# EAGLE board CheckBatteryVoltage (EAGLE 9.5.2)

Size 100.33 x 69.85 mm. Coordinates in mm from the lower left corner, seen from the top.
Outline: 0,22.86 0,0 100.33,0 100.33,69.85
Outline: 0,22.86 0,41.27
Outline: 0,41.27 0,48.26
Outline: 0,48.26 0,69.85 24.13,69.85
Outline: 24.13,69.85 100,69.85
Outline: 0,48.26 24.13,48.26 24.13,69.85
Outline: 0,41.27 50.16,41.27 50.16,22.86 0,22.86
Copper layers (1*16): Top 0.035mm / dielectric 1.5mm / Bottom 0.035mm
Design rules "default": minimum track width 10mil, minimum drill 24mil, track to track 8mil, track to pad 8mil, pad to pad 8mil, via to via 8mil, smd to smd 8mil, copper to edge 40mil, drill to drill 8mil, minimum pad ring 10mil, minimum via ring 8mil, stop-mask expansion 4mil, vias tented up to drill 0mil, thermal gap 10mil
Holes 2 mm at 1.91,67.94 1.91,50.16 22.23,50.16 22.23,67.94 1.91,39.37 1.91,24.77 48.26,24.77 48.26,39.37
Holes 0.35 mm at 82.55,42.55 83.19,62.87 48.9,62.87

## Footprints (pad centres in the part's own frame; a part is rotated, then mirrored left to right if it is on the bottom)
ZDIO-7.5 = drill 0.813 octagon: A 3.81,0; C -3.81,0
0204/7 = drill 0.813 octagon: 1 -3.81,0; 2 3.81,0
PAD-01 = drill 1.321 pad 2.54 octagon: 1 0,0
TL1105 = drill 1 pad 1.676: 1 -2.25,3.25; 2 2.25,3.25; 3 -2.25,-3.25; 4 2.25,-3.25
RTRIM3296W = drill 0.61: 1 0,-2.54; 2 0,0; 3 0,2.54
P1-20Y = drill 2.007 pad 2.54 long: TP 0,0
P1-17Y = drill 1.702 pad 2.121 long: TP 0,0
DIL08 = drill 0.813 long: 1 -3.81,-3.81; 2 -1.27,-3.81; 3 1.27,-3.81; 4 3.81,-3.81; 5 3.81,3.81; 6 1.27,3.81; 7 -1.27,3.81; 8 -3.81,3.81
LSP10 = drill 1.016 pad 2.159 octagon: MP 0,0
TO92- = drill 0.813 long: 1 2.54,0; 2 0,0; 3 -2.54,0
1X01/90 = drill 1.016 long: 1 -1.27,-3.81
E5-8,5 = drill 1.016 pad 2.54: + -2.54,0 | drill 1.016 pad 2.54 octagon: - 2.54,0
MA04-1 = drill 1.016 long: 1 -3.81,0; 2 -1.27,0; 3 1.27,0; 4 3.81,0
MA06-1 = drill 1.016 long: 1 -6.35,0; 2 -3.81,0; 3 -1.27,0; 4 1.27,0; 5 3.81,0; 6 6.35,0
W237-132 = drill 1.194 long: 1 -2.54,-0.635; 2 2.54,-0.635
RS-2,5 = drill 0.813 pad 1.6 octagon: 1 -1.27,0; 2 1.27,0
2X02/90 = drill 1.016 octagon: 1 -1.27,-6.35; 2 -1.27,-3.81; 3 1.27,-6.35; 4 1.27,-3.81
DIL06 = drill 0.813 long: 1 -2.54,-3.81; 2 0,-3.81; 3 2.54,-3.81; 4 2.54,3.81; 5 0,3.81; 6 -2.54,3.81

## Placement (x,y rotation side)
E$1  zener 2.4  [ZDIO-7.5]  13.97,66.04 0 top
E$2  220  [0204/7]  20.95,59.05 270 top
E$3  [PAD-01]  64.14,27.94 0 top
E$4  [TL1105]  108.32,15.38 90 top  (outside the outline)
E$5  [PAD-01]  64.14,22.86 0 top
E$6  [PAD-01]  97.79,63.5 0 top
E$7  [RTRIM3296W]  93.34,31.75 270 top
E$8  [P1-20Y]  4.45,55.88 90 top
E$9  [P1-17Y]  89.53,12.7 0 top
E$10  [P1-20Y]  4.45,61.59 90 top
E$11  [P1-20Y]  12.7,51.44 90 top
E$12  Attiny85  [DIL08]  15.24,31.75 0 top
E$13  [PAD-01]  97.79,66.67 0 top
E$14  zener 2.4  [ZDIO-7.5]  22.23,31.75 270 top
E$15  220  [0204/7]  25.4,31.75 270 top
E$16  1M  [LSP10]  94.61,60.33 0 top
E$17  [0204/7]  113.03,25.4 90 top  (outside the outline)
E$18  [TO92-]  104.14,55.88 90 top  (outside the outline)
E$19  [LSP10]  97.79,60.33 0 top
E$20  [P1-20Y]  5.71,34.29 90 top
E$21  [P1-20Y]  5.71,28.57 90 top
E$22  [1X01/90]  112.39,40.01 180 top  (outside the outline)
E$23  [E5-8,5]  106.05,25.4 270 top  (outside the outline)
E$24  [PAD-01]  94.61,66.67 0 top
E$26  [MA04-1]  102.87,15.24 90 top
E$27  220  [0204/7]  27.94,31.75 90 top
E$28  [MA06-1]  103.93,39.79 90 top  (outside the outline)
E$29  [W237-132]  105.73,66.04 180 top
E$30  [RS-2,5]  113.03,50.8 90 top  (outside the outline)
E$31  [2X02/90]  108.78,51.77 180 top  (outside the outline)
E$32  220  [0204/7]  39.37,31.75 270 top
E$33  Til113  [DIL06]  33.66,31.75 0 top
E$35  [MA04-1]  114.3,13.34 90 top  (outside the outline)
E$37  [P1-17Y]  45.72,35.56 90 top
E$38  [P1-17Y]  45.72,27.94 90 top
E$39  [P1-17Y]  45.72,31.75 90 top
E$45  Attiny85  [DIL08]  13.97,59.05 0 top

## Library data of the parts
E$1 E$14 E$23 = ref-packages-longpad
E$2 E$15 E$17 E$27 E$32 = eagle-ltspice
E$3 E$5 E$6 E$13 E$24 E$30 = discrete
E$4 = switch
E$7 = rcl
E$8-E$11 E$20 E$21 E$37-E$39 = testpad
E$12 E$45 = 74xx-us
E$16 E$19 = solpad
E$18 = transistor-fet
E$22 E$31 = pinhead
E$26 E$28 E$35 = con-lstb
E$29 = con-wago-508
E$33 = ic-package

## Nets
S$3: E$11.TP E$45.2
S$4: E$1.C E$10.TP E$45.8
S$5: E$2.2 E$8.TP E$45.4
S$7: E$12.3 E$14.A E$15.1
S$8: E$1.A E$2.1 E$45.3
S$9: E$12.8 E$14.C E$20.TP
S$11: E$12.2 E$33.1
S$13: E$27.2 E$33.2
S$14: E$12.4 E$15.2 E$21.TP E$27.1
S$15: E$33.5 E$37.TP
S$16: E$32.1 E$33.4 E$39.TP
S$17: E$32.2 E$38.TP

## Tracks (layer width: path | path; a pad name or v marks a point on that pad's centre or on a via)
S$3  (1 unrouted)
S$4  (2 unrouted)
S$5  (2 unrouted)
S$7  (2 unrouted)
S$8  (2 unrouted)
S$9  (2 unrouted)
S$11  (1 unrouted)
S$13  (1 unrouted)
S$14  (3 unrouted)
S$15  (1 unrouted)
S$16  (2 unrouted)
S$17  (1 unrouted)

## Text on the board
bPlace: Decoupler | AVR RECEIVER | AVR TRASMITTER | Vcc | Demux | Gnd
tTest: Gnd | Sng | Vin
bTest: Vcc battery | Gnd battery | Tx | Vcc battery | Vcc cell battery | Gnd cell battery | Tx